# Altium PCB CaINv2.2.PcbDoc
Units mil, origin at the board's own origin, x right, y up, seen from the top; angles counter-clockwise.
Board outline 2625.03 x 2305.03 mil, 2 copper layers (Top Layer, Bottom Layer); 45 components, 41 nets, 135 pads, 17 vias.
Unrouted connection lines stored in the file: 70.
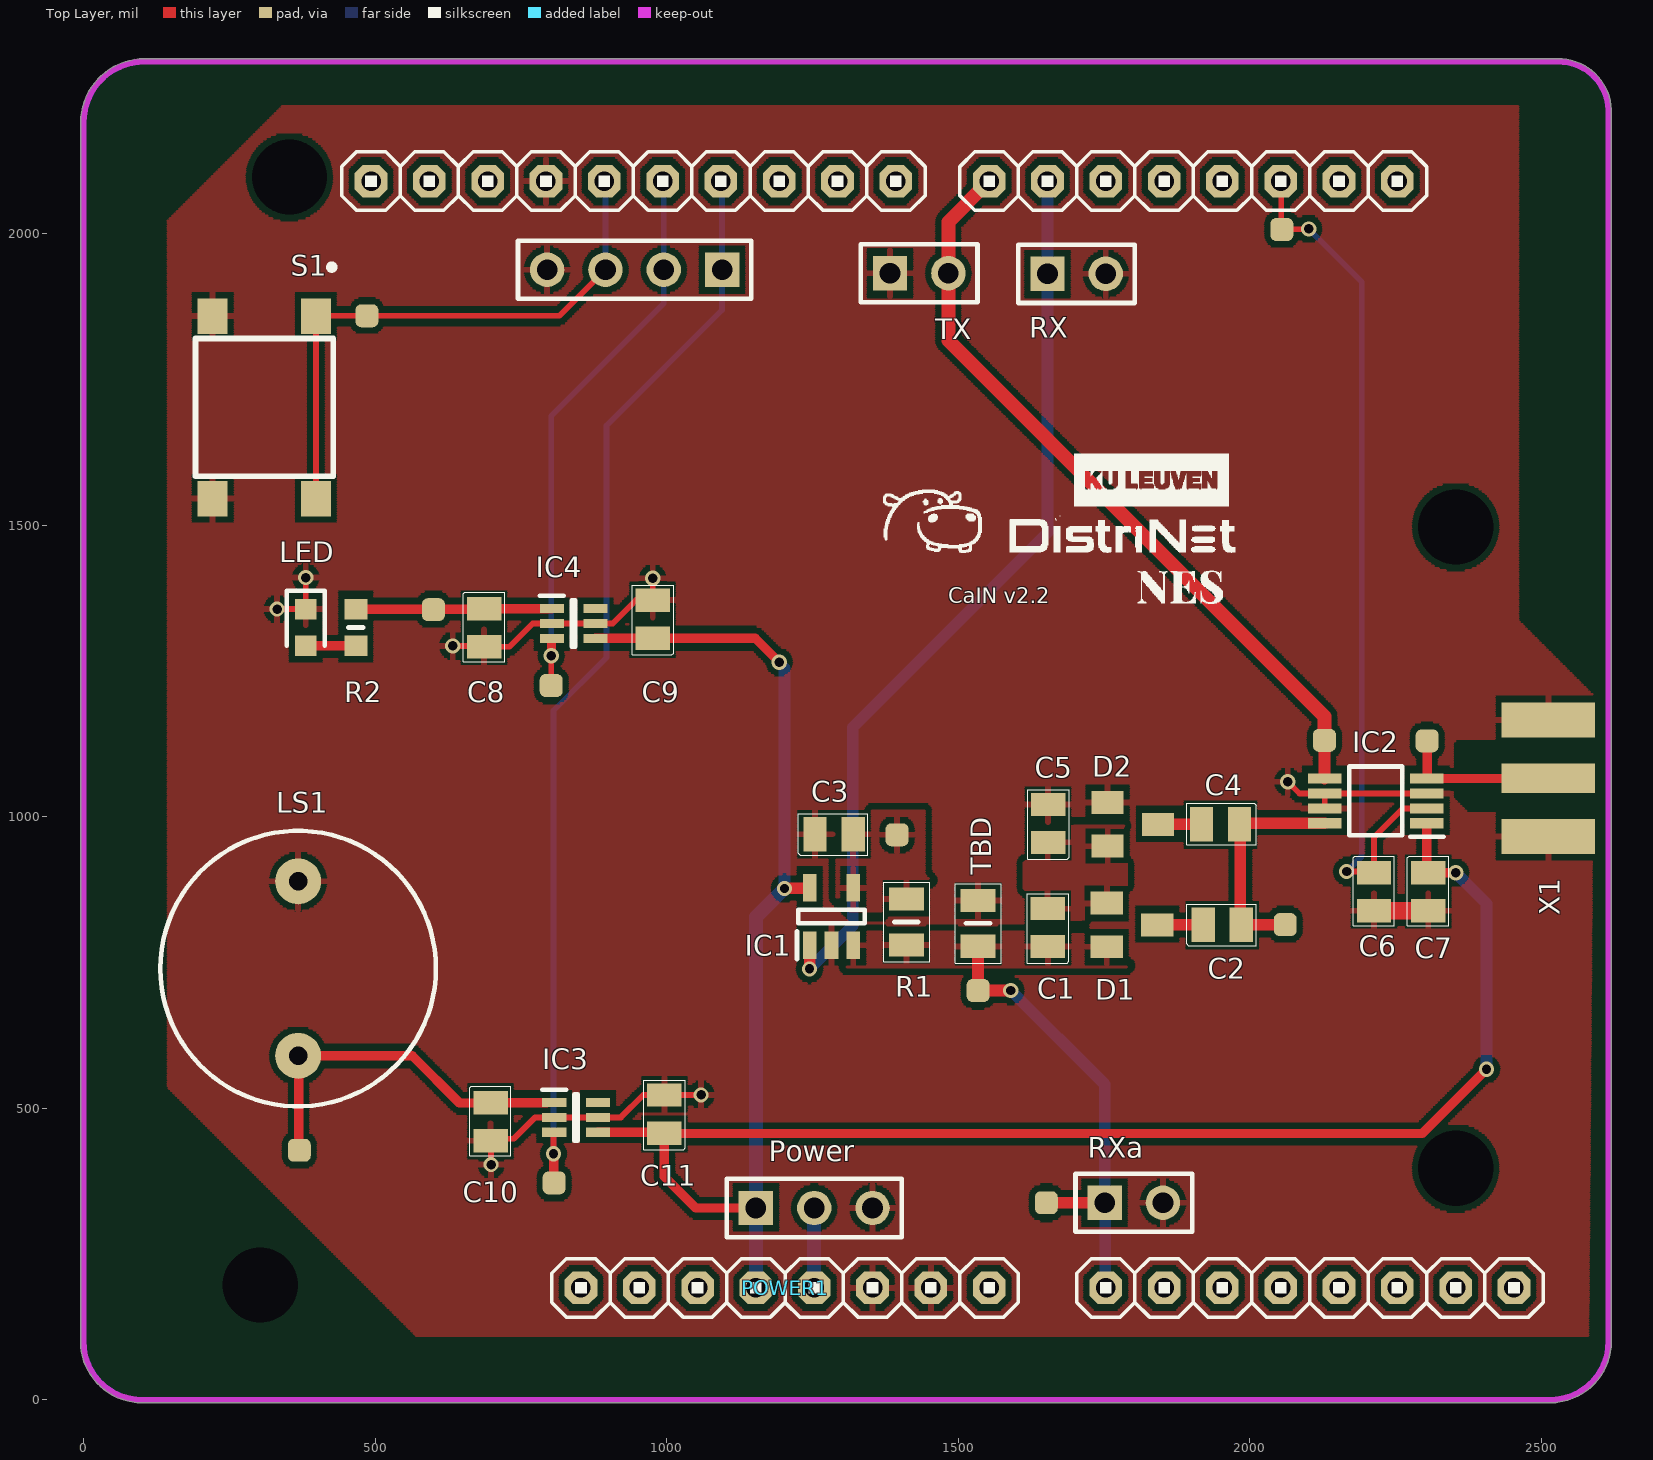
[diagram p0: Top Layer view]
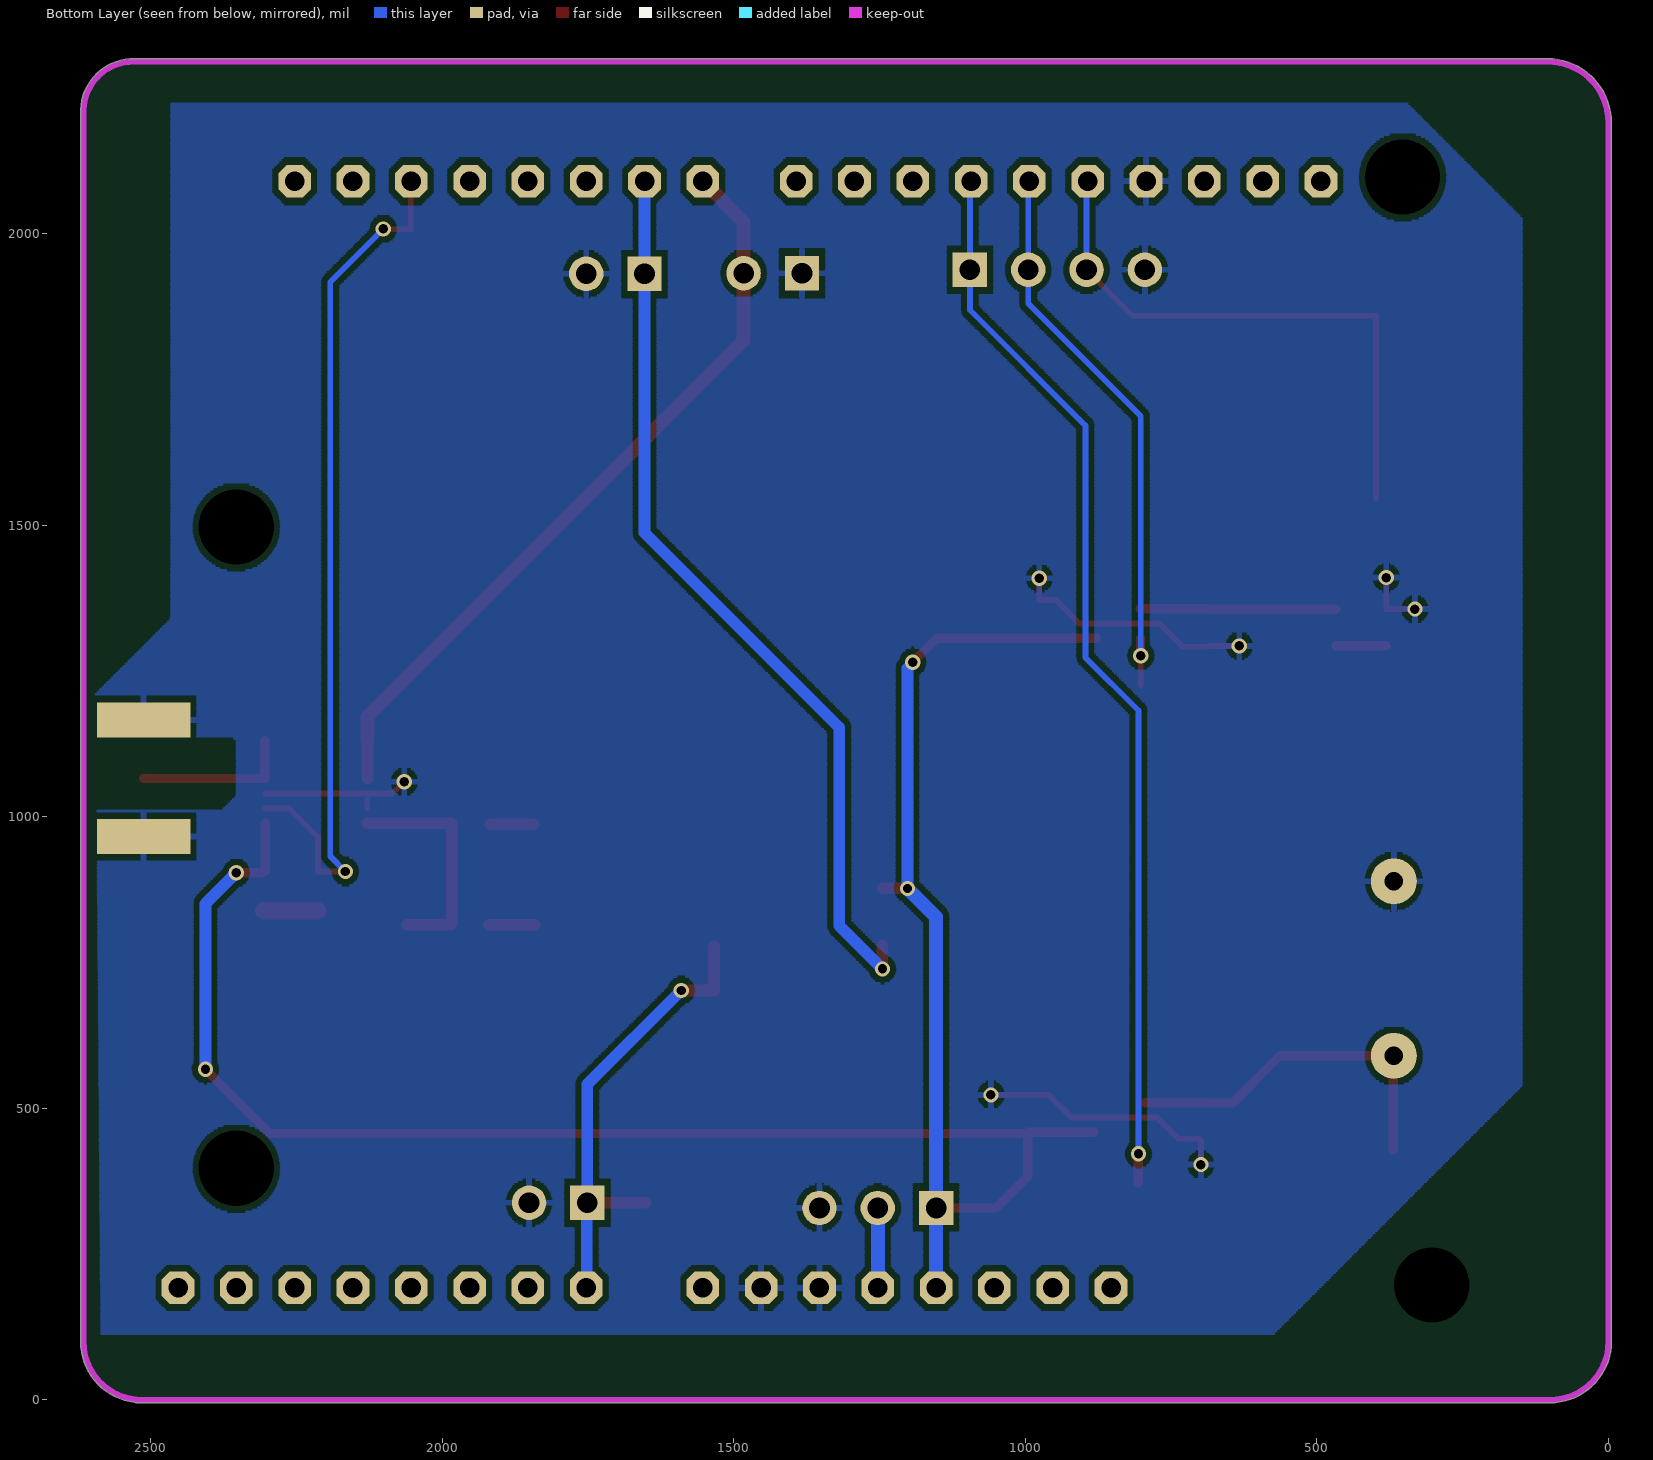
[diagram p1: Bottom Layer view, seen from below]

## Layer stack, top to bottom
Top Solder: solder mask 0.4, Solder Resist, Dk 3.5
Top Layer: signal copper 1.4
Dielectric 1: dielectric 12.6, FR-4, Dk 4.8
Bottom Layer: signal copper 1.4
Bottom Solder: solder mask 0.4, Solder Resist, Dk 3.5

## Board outline
-5.02,100 ccw(c100,100) 100,-5.02 2525,-5.02 2527.66,-4.25 ccw(c2515,100) 2620.02,100 2620.01,100.03 2619.64,2212.16 2619.64,2212.29 ccw(c2529.99,2209.99) 2527.76,2299.64 105,2300.01 ccw(c105,2190) -5.02,2190

## Design rules (kind name [scope] priority, off if disabled: settings)
Clearance [All] p1: gap=10 ignorepadtopadclearanceinfootprint=FALSE except(6: Arc-SMDPad Arc-Text Arc-Hole Track-SMDPad Track-Text Track-Hole SMDPad-SMDPad SMDPad-Text SMDPad-Hole THPad-Text THPad-Hole Via-Text Via-Hole Fill-Text Fill-Hole Poly-Text Poly-Hole Region-Text Region-Hole Text-Text Text-Hole; 8: Arc-Arc Arc-Track Arc-THPad Arc-Via Track-Track Track-THPad Track-Via SMDPad-THPad SMDPad-Via THPad-THPad THPad-Via Via-Via)
HoleSize [All] p1: absolutevalues=TRUE maxlimit=200 minlimit=1 maxpercent=80.000 minpercent=20.000
MinimumSolderMaskSliver [All] p1: minsoldermaskwidth=4
PolygonConnect [All] p1: connectstyle=Relief reliefconductorwidth=10 reliefentries=4 polygonreliefangle="90 Angle" airgapwidth=10
RoutingVias [All] p1: holewidth=16 width=26 viastyle="Through Hole" minholewidth=12 minwidth=22 maxholewidth=24 maxwidth=34
SilkToSilkClearance [All] p1: silktosilkclearance=2
SilkToSolderMaskClearance [IsPad] p1: minsilkscreentomaskgap=2 clearancetoexposedcopper=TRUE
SolderMaskExpansion [All] p1: expansion=4 istentingtop=FALSE
Width [All] p1: maxlimit=30 minlimit=6 preferedwidth=10
26 further rules are at their usual default settings.

## Classes and differential pairs
component class CaINv2.2: C1 C2 C3 C4 C5 C6 C7 C8 C9 C10 C11 D1 D2 IC1 IC2 IC3 IC4 LS1 POWER1 R1 R2 RF_switch S1 sma X1

## Components (designator, comment, footprint, x,y, rotation, side; value= is the part's Value field where it differs from the comment)
ADC1 "8x1F-H8.5" 1X08 2102.98,192 r0 top
C1 "4.7pF" CAPC2012X145N 1653.68,810 r270 top
C2 "4.7pF" CAPC2012X145N 1952.68,815 r180 top
C3 "10nF" CAPC2012X145N 1287,970 r180 top
C4 "4.7pF" CAPC2012X145N 1949.68,987 r0 top
C5 "4.7pF" CAPC2012X145N 1654,988.32 r270 top
C6 "100 pF" CAPC2012X145N 2213,871.32 r90 top
C7 "100 pF" CAPC2012X145N 2306,871.32 r90 top
C8 "0.1uF" CAPC2012X145N 687,1324 r90 top
C9 "0.1uF" CAPC2012X145N 976,1338.68 r270 top
C10 "0.1uF" CAPC2012X145N 698,477 r90 top
C11 "0.1uF" CAPC2012X145N 996,490 r270 top
D1 "RB706F-40FHT106" SOT23 1797.99,814.4 r270 top
D2 "RB706F-40FHT106" SOT23 1799.37,987 r270 top
IC1 "TLV7031DBVR" SOT95P280X145-5N 1282.6,828.79 r90 top
IC2 "ADG918BRMZ-REEL7" SOP65P490X110-8N 2216,1027 r180 top
IC3 "SIP32431DR3-T1GE3" SOT65P210X110-6N 844.6,484.41 r0 top
IC4 "SIP32431DR3-T1GE3" SOT65P210X110-6N 840.4,1331.41 r0 top
LED "LTST-C191KGKT" LEDC1608X55N 381,1324.5 r270 top (schematic designator LED1)
LS1 "CMI-1295IC-0385T" CMI1295IC0385T 368,889.21 r180 top
P4 "Header 4" HDR1X4 1095,1938 r180 top
Power "Header 3" HDR1X3 1153,329 r0 top (schematic designator P3)
POWER1 "8x1F-H8.5" 1X08 1202.98,192 r0 top
PWM1 "8x1F-H8.5" 1X08 1902.98,2090 r180 top locked
PWMH1 "10x1F-H8.5" 1X10 942.98,2090 r0 top locked
R1 "TBD" RESC2012X50N 1411,819.37 r270 top
R2 "40.2ohm" RESC1608X55N 467,1324.5 r270 top
RX "Header 2" HDR1X2 1653,1931 r0 top (schematic designator P2)
RXa "Header 2" HDR1X2 1751,338 r0 top (schematic designator P5)
S1 "Logger Switch" PTS645(SMT) 310,1702 r270 top
TBD "TBD" RESC2012X50N 1534,817 r270 top (schematic designator R4)
TP1 "TP" TestPoint 1395,969 r90 top
TP2 "TP" TestPoint 1534,702 r90 top
TP3 "TP" TestPoint 2055,2007 r180 top
TP4 "TP" TestPoint 1651,338 r90 top
TP5 "TP" TestPoint 2060.77,815 r90 top
TP6 "TP" TestPoint 802,1225 r90 top
TP7 "TP" TestPoint 2304,1130 r90 top
TP8 "TP" TestPoint 2128,1131 r90 top
TP9 "TP" TestPoint 486,1859 r90 top
TP10 "TP" TestPoint 600,1355 r90 top
TP11 "TP" TestPoint 370,428 r180 top
TP12 "TP" TestPoint 807,372 r90 top
TX "Header 2" HDR1X2 1383,1932 r0 top (schematic designator P1)
X1 "SMACONNECTOR_EDGE" SMA_EDGELAUNCH 2592,1066 r180 top

## Footprints (in the part's own frame and the unit in brackets; to place one, negate y for a bottom-side part, rotate by r counter-clockwise, add the part's x,y. Pads: shape width x height; smd on the part's side, far side on the other; paste and mask are expansions set on the pad)
1X08 [mil]
  oct 56x56 hole 33.46: 1(-350,0) 2(-250,0) 3(-150,0) 4(-50,0) 5(50,0) 6(150,0) 7(250,0) 8(350,0)
  silkscreen extent -400,-50 400,50
1X10 [mil]
  oct 56x56 hole 33.46: 1(-450,0) 2(-350,0) 3(-250,0) 4(-150,0) 5(-50,0) 6(50,0) 7(150,0) 8(250,0) 9(350,0) 10(450,0)
  silkscreen extent -500,-50 500,50
CAPC2012X145N [mil]
  rect 40x59 smd: 1(-32.68,0) 2(32.68,0)
  silkscreen extent -58,-35 61,36, body extent -39,-25 39,25, height 57
CMI1295IC0385T [mm]
  round 2 hole 0.8: 1(0,0) 2(0,7.6)
  silkscreen extent -6,-2.2 6,9.8, body extent -5.99,-2.2 5.99,9.8, height 9.7
HDR1X2 [mm] "Connector; Header; 2 Position"
  rect 1.5x1.5 hole 0.9: 1(0,0)
  round 1.5 hole 0.9: 2(2.54,0)
  silkscreen extent -1.27,-1.27 3.81,1.27, body extent -1.27,-1.27 3.81,1.27, height 7.58
HDR1X3 [mm] "Connector; Header; 3 Position"
  rect 1.5x1.5 hole 0.9: 1(0,0)
  round 1.5 hole 0.9: 2(2.54,0) 3(5.08,0)
  silkscreen extent -1.27,-1.27 6.35,1.27, body extent -1.27,-1.27 6.35,1.27, height 7.58
HDR1X4 [mm] "Connector; Header; 4 Position"
  rect 1.5x1.5 hole 0.9: 1(0,0)
  round 1.5 hole 0.9: 2(2.54,0) 3(5.08,0) 4(7.62,0)
  silkscreen extent -1.27,-1.27 8.89,1.27, body extent -1.27,-1.27 8.89,1.27, height 7.58
LEDC1608X55N [mm]
  rect 0.9x0.95 smd: 1(-0.8,0) 2(0.8,0)
  silkscreen extent -1.6,-0.82 0.8,0.82, body extent -0.83,-0.4 0.77,0.4, height 0.55
PTS645(SMT) [mm]
  rect 1.55x1.3 smd: 1(-3.975,2.25) 2(3.975,2.25) 3(-3.975,-2.25) 4(3.975,-2.25)
  silkscreen extent -6.23,-3 3,3.06, body extent -4.5,-3 4.5,3, height 4.3
RESC1608X55N [mm]
  rect 0.9x1 smd: 1(-0.8,0) 2(0.8,0)
  silkscreen extent 0,-0.33 0,0.33, body extent -0.8,-0.4 0.8,0.4, height 0.45
RESC2012X50N [mil]
  rect 40x60 smd: 1(-39.37,0) 2(39.37,0)
  silkscreen extent -68,-39 68,40, body extent -40,-25 40,25, height 20
SMA_EDGELAUNCH [mil]
  rect 160x60 smd paste+0: GND@1(80,-100) GND@2(80,100)
  rect 160x60 smd far side paste+0: GND@3(80,100) GND@4(80,-100)
  rect 160x50 smd paste+0: P(80,0)
SOP65P490X110-8N [mm]
  rect 1.45x0.45 smd: 1(-2.225,0.975) 2(-2.225,0.325) 3(-2.225,-0.325) 4(-2.225,-0.975) 5(2.225,-0.975) 6(2.225,-0.325) 7(2.225,0.325) 8(2.225,0.975)
  silkscreen extent -2.95,-1.5 1.15,1.55, body extent -2.45,-1.5 2.45,1.5, height 1.1
SOT23 [mm]
  rect 1x1.4 smd: 1(-0.95,-1.1) 2(0.95,-1.1) 3(0,1.1)
SOT65P210X110-6N [mm]
  rect 1.05x0.4 smd: 1(-0.95,0.65) 2(-0.95,0) 3(-0.95,-0.65) 4(0.95,-0.65) 5(0.95,0) 6(0.95,0.65)
  silkscreen extent -1.48,-1.01 0.08,1.2, body extent -1.05,-1.01 1.05,1.01, height 1.1
SOT95P280X145-5N [mm]
  rect 1.2x0.6 smd: 1(-1.25,0.95) 2(-1.25,0) 3(-1.25,-0.95) 4(1.25,-0.95) 5(1.25,0.95)
  silkscreen extent -1.85,-1.45 0.3,1.5, body extent -1.4,-1.45 1.4,1.45, height 1.45
TestPoint [mm]
  rrect50% 1x1 smd: TP(0,0)

## Part data
ADC1 POWER1 PWM1: library part PINHD-1X8
C1 C2 C4 C5 C6 C7 C8 C9 C10 C11: library part VJ0805A101JXBMC, "Capacitor", Manufacturer_Name=Vishay, Mouser Part Number=77-VJ0805A101JXBMC, Arrow Part Number=VJ0805A101JXBMC, Arrow Price/Stock=https://www.arrow.com/en/products/vj0805a101jxbmc/vishay?region=nac, Datasheet Link=http://www.vishay.com/docs/45226/vj31xrohsautomlcc.pdf, Height=1.45mm, Manufacturer_Part_Number=VJ0805A101JXBMC, Mouser Price/Stock=https://www.mouser.co.uk/ProductDetail/Vishay-Vitramon/VJ0805A101JXBMC?qs=DyYCzLTSlfCgHy2DX6Cz6w%3D%3D
C3: library part VJ0805Y103KXBAC, "Capacitor", Manufacturer_Name=Vishay, Mouser Part Number=77-VJ08Y100V103K, Arrow Part Number=VJ0805Y103KXBAC, Arrow Price/Stock=https://www.arrow.com/en/products/vj0805y103kxbac/vishay?region=nac, Datasheet Link=http://www.vishay.com/docs/45226/vj31xrohsautomlcc.pdf, Height=1.45mm, Manufacturer_Part_Number=VJ0805Y103KXBAC, Mouser Price/Stock=https://www.mouser.co.uk/ProductDetail/Vishay-Vitramon/VJ0805Y103KXBAC?qs=IRuQNBqMOckF0HeddYSaNg%3D%3D
D1 D2: library part DIODE_2CACA-SOT23, "2 Diodes - Cathode-Anode", DeviceName=SOT23, DeviceSetName=DIODE_2CACA-, GateName_1=-B1, LibraryName=diode, POPULARITY=1, SymbolName_1=KA2KA
IC1: "Integrated Circuit", Manufacturer_Name="Texas Instruments", Mouser Part Number=595-TLV7031DBVR, Arrow Part Number=TLV7031DBVR, Arrow Price/Stock=https://www.arrow.com/en/products/tlv7031dbvr/texas-instruments?region=nac, Datasheet Link=http://www.ti.com/lit/gpn/TLV7031, Height=1.45mm, Manufacturer_Part_Number=TLV7031DBVR, Mouser Price/Stock=https://www.mouser.co.uk/ProductDetail/Texas-Instruments/TLV7031DBVR?qs=EBDBlbfErPzxbC0zg598sw%3D%3D
IC2: "Integrated Circuit", Manufacturer_Name="Analog Devices", Mouser Part Number=584-ADG918BRMZ-R7, Arrow Part Number=ADG918BRMZ-REEL7, Arrow Price/Stock=https://www.arrow.com/en/products/adg918brmz-reel7/analog-devices, Datasheet Link=https://www.analog.com/media/en/technical-documentation/data-sheets/ADG918_919.pdf, Height=1.1mm, Manufacturer_Part_Number=ADG918BRMZ-REEL7, Mouser Price/Stock=https://www.mouser.co.uk/ProductDetail/Analog-Devices/ADG918BRMZ-REEL7?qs=BpaRKvA4VqEay0U7Dc17vw%3D%3D
IC3 IC4: "Integrated Circuit", Manufacturer_Name=Vishay, Mouser Part Number=781-SIP32431DR3-GE3, Arrow Part Number=SIP32431DR3-T1GE3, Arrow Price/Stock=https://www.arrow.com/en/products/sip32431dr3-t1ge3/vishay?region=nac, Datasheet Link=https://www.vishay.com/docs/66597/sip32431.pdf, Height=1.1mm, Manufacturer_Part_Number=SIP32431DR3-T1GE3, Mouser Price/Stock=https://www.mouser.co.uk/ProductDetail/Vishay-Semiconductors/SIP32431DR3-T1GE3?qs=FfLXECYddQQfTuH6ZEcWCg%3D%3D
LED: "LED", Manufacturer_Name=Lite-On, Mouser Part Number=859-LTST-C191KGKT, Arrow Part Number=LTST-C191KGKT, Arrow Price/Stock=https://www.arrow.com/en/products/ltst-c191kgkt/lite-on-technology?region=nac, Datasheet Link=http://www.mouser.com/ds/2/239/S_110_LTST-C191KGKT-369560.pdf, Height=0.55mm, Manufacturer_Part_Number=LTST-C191KGKT, Mouser Price/Stock=https://www.mouser.co.uk/ProductDetail/Lite-On/LTST-C191KGKT?qs=xSPZu9B1aMCRQ5ACasEYAg%3D%3D
LS1: "Loudspeaker or Buzzer", Manufacturer_Name="CUI Devices", Mouser Part Number=490-CMI-1295IC-0385T, Arrow Part Number=CMI-1295IC-0385T, Arrow Price/Stock=https://www.arrow.com/en/products/cmi-1295ic-0385t/cui-devices?region=nac, Datasheet Link=https://www.arrow.com/en/products/cmi-1295ic-0385t/cui-devices, Height=9.7mm, Manufacturer_Part_Number=CMI-1295IC-0385T, Mouser Price/Stock=https://www.mouser.co.uk/ProductDetail/CUI-Devices/CMI-1295IC-0385T?qs=OlC7AqGiEDk2g42uzfEhlg%3D%3D
P4: "Header, 4-Pin", LatestRevisionDate=17-Jul-2002, LatestRevisionNote="Re-released for DXP Platform.", Publisher="Altium Limited"
Power: "Header, 3-Pin", LatestRevisionDate=17-Jul-2002, LatestRevisionNote="Re-released for DXP Platform.", Publisher="Altium Limited"
PWMH1: library part PINHD-1X10
R1 TBD: library part RCS0805100KFKEA, "Resistor", Manufacturer_Name=Vishay, Mouser Part Number=71-RCS0805100KFKEA, Arrow Part Number=RCS0805100KFKEA, Arrow Price/Stock=https://www.arrow.com/en/products/rcs0805100kfkea/vishay?region=nac, Datasheet Link=https://componentsearchengine.com/Datasheets/2/RCS0805100KFKEA.pdf, Height=0.5mm, Manufacturer_Part_Number=RCS0805100KFKEA, Mouser Price/Stock=https://www.mouser.co.uk/ProductDetail/Vishay-Dale/RCS0805100KFKEA?qs=NKmfXavxMay%252BH0mbX9hKBw%3D%3D
R2: library part ERJ-3EKF40R2V, "Resistor", Manufacturer_Name=Panasonic, Mouser Part Number=667-ERJ-3EKF40R2V, Datasheet Link=http://industrial.panasonic.com/cdbs/www-data/pdf/RDA0000/AOA0000C86.pdf, Height=0.55mm, Manufacturer_Part_Number=ERJ-3EKF40R2V, Mouser Price/Stock=https://www.mouser.co.uk/ProductDetail/Panasonic/ERJ-3EKF40R2V?qs=MVjVSMjNRMp%252B0A6%252BSZkn3A%3D%3D
RX RXa TX: "Header, 2-Pin", LatestRevisionDate=17-Jul-2002, LatestRevisionNote="Re-released for DXP Platform.", Publisher="Altium Limited"
S1: library part PTS645SM43SMTR92LFS, "SwitchPTS645SM43SMTR92LFS", Manufacturer_Name="C & K COMPONENTS", Mouser Part Number=611-PTS645SM43SMTR92, Arrow Part Number=PTS645SM43SMTR92LFS, Arrow Price/Stock=https://www.arrow.com/en/products/pts645sm43smtr92lfs/ck, Datasheet Link=https://www.ckswitches.com/media/1471/pts645.pdf, Manufacturer_Part_Number=PTS645SM43SMTR92LFS, Mouser Price/Stock=https://www.mouser.co.uk/ProductDetail/CK/PTS645SM43SMTR92LFS?qs=FESYatJ8odKPktxv6ncfWg%3D%3D
TP1 TP2 TP3 TP4 TP5 TP6 TP7 TP8 TP9 TP10 TP11 TP12: library part TestPoint
X1: "SMA Connector   90掳 DIP SMA Connector, 50 Ohm (4UConnector: 07259)", DeviceName=_EDGE, DeviceSetName=SMACONNECTOR, GateName_1=G$1, LibraryName=adafruit, SymbolName_1=SMACONNECTOR

## Free pads (board coordinates)
  round 0 hole 128.98 unplated: M1(352.98,2097) M2(302.98,197) M3(2352.98,1497) M4(2352.98,397)

## Via types
v1: diameter 26, hole 16, Top Layer to Bottom Layer, 17 vias

## Nets (pads, with @x,y where several pads share a name; then routed paths per layer and width w, separated by ;. In a path a pad name is that pad's centre, name@x,y a point inside that pad or via, vN(x,y) a via of type N, cw(c..) or ccw(c..) an arc to the next point about the centre after c; other vN are vias at no path point)
5V: POWER1.5 Power.2 | length 137
  Bottom Layer w24: POWER1.5 Power.2
Antenna: IC2.4 TP7.TP X1.P | length 272.9
  Top Layer w16: IC2.4 2511.39,1065.39 X1.P ; IC2.4@2304,1065.79 TP7.TP
BeepPositive: C10.2 IC3.1 LS1.2 TP11.TP | length 619.3
  Top Layer w16: LS1.2 563.68,590 644.53,509.16 C10.2@697.48,509.16 ; TP11.TP@369,429 LS1.2@369,589 ; C10.2 IC3.1@794.33,509.68
BeepSW: IC3.3 P4.1 PWMH1.7 TP12.TP | length 1873.2
  Top Layer w10: v1(806,422) IC3.3@806,457.62
  Top Layer w16: TP12.TP@806.5,372.5 v1@806.5,421.5
  Bottom Layer w10: v1(806,422) 806,1182 897,1273 897,1671 1095,1869 1095,2087.98 PWMH1.7
Comparator_vRef: C3.1 IC1.4 R1.1 TP1.TP
GND: C3.2 C5.1 C6.1 C7.1 C8.1 C9.1 C10.1 C11.1 D2.1 IC1.2 IC2.3 IC2.6 IC2.7 IC3.2 IC3.5 IC4.2 IC4.5 LED.1 LS1.1 P4.4 POWER1.6 POWER1.7 Power.3 PWMH1.4 RX.2 RXa.2 S1.3 S1.4 TBD.1 TX.1 X1.GND@1 X1.GND@2 X1.GND@3 X1.GND@4 | length 1314.8
  Top Layer w10: v1(332,1356) LED.1 v1(381,1410) ; v1(633,1293) C8.1@685.32,1293 ; C8.1 730.32,1291.32 770.41,1331.41 IC4.2 IC4.5 907.41,1331.41 947.35,1371.35 C9.1 ; v1(699,403.32) 698.46,403.87 698.46,443.87 C10.1 701.32,447.64 737.64,447.64 774.41,484.41 IC3.2 921.41,484.41 959.68,522.68 C11.1 ; v1(976,1409) 976,1372.65 C9.1@976.65,1372 ; C11.1@996.32,523 v1(1059,523) ; v1(2065,1060) 2085.2,1039.8 IC2.6 ; IC2.7 IC2.6 ; IC2.3 IC2.6
  Top Layer w30: C6.1 C7.1
LED: IC4.3 P4.2 PWMH1.6 TP6.TP | length 975
  Top Layer w10: TP6.TP v1(802,1276)
  Top Layer w16: v1@802.5,1276.5 IC4.3@802.5,1305.69
  Bottom Layer w10: v1(802,1276) 802,1687 995,1880 995,2087.98 PWMH1.6
LED3V3: C8.2 IC4.1 R2.1 TP10.TP | length 333
  Top Layer w16: R2.1@467.5,1355.5 TP10.TP@599.5,1355.5 ; TP10.TP@600.84,1355.84 C8.2@686.16,1355.84 ; C8.2@687.2,1356.87 IC4.1@802.87,1356.87
"Logger Button": P4.3 PWMH1.5 S1.1 S1.2 TP9.TP | length 994.5
  Top Layer w10: S1.2 S1.1 ; S1.1@399.09,1859 TP9.TP 816,1859 P4.3
  Bottom Layer w10: PWMH1.5 895,2087.98 P4.3
NetADC1_2: ADC1.2
NetADC1_3: ADC1.3
NetADC1_4: ADC1.4
NetADC1_5: ADC1.5
NetADC1_6: ADC1.6
NetADC1_7: ADC1.7
NetADC1_8: ADC1.8
NetC1_1: C1.1 C5.2 D1.1 D2.2
NetC2_2: C2.2 D1.3 | length 78.1
  Top Layer w20: D1.3@1841.6,814.7 C2.2@1919.7,814.7
NetC4_1: C4.1 D2.3 | length 74.3
  Top Layer w20: D2.3 C4.1
NetLED1_2: LED.2 R2.2 | length 86
  Top Layer w16: LED.2 R2.2
NetPOWER1_1: POWER1.1
NetPOWER1_2: POWER1.2
NetPOWER1_3: POWER1.3
NetPOWER1_8: POWER1.8
NetPWM1_1: PWM1.1
NetPWM1_2: PWM1.2
NetPWM1_4: PWM1.4
NetPWM1_5: PWM1.5
NetPWM1_6: PWM1.6
NetPWMH1_1: PWMH1.1
NetPWMH1_2: PWMH1.2
NetPWMH1_3: PWMH1.3
NetPWMH1_8: PWMH1.8
NetPWMH1_9: PWMH1.9
NetPWMH1_10: PWMH1.10
Rx_DueGPIO: IC1.1 PWM1.7 RX.1 | length 1560.4
  Top Layer w20: v1@1245.1,739.1 IC1.1@1245.1,779.48
  Bottom Layer w20: v1(1245,739) 1319,813 1319,1153 1653,1487 RX.1 PWM1.7
Rx_StaticInput: C2.1 C4.2 IC2.8 TP5.TP | length 389.1
  Top Layer w20: C2.1@1983.85,816.5 C4.2@1983.85,985.5 ; C4.2@1983.97,988.61 IC2.8 ; C2.1 TP5.TP@2061,815
Rx_StaticOutput: ADC1.1 C1.2 D1.2 IC1.3 R1.2 RXa.1 TBD.2 TP2.TP TP4.TP | length 806.3
  Top Layer w20: TBD.2 TP2.TP v1(1590,702) ; TP4.TP RXa.1
  Bottom Layer w20: v1(1590,702) 1751,541 RXa.1 ; ADC1.1@1751.99,192.99 RXa.1@1751.99,337.01
T/R_SwitchGPIO: C6.2 IC2.2 PWM1.3 TP3.TP | length 1493.4
  Top Layer w10: TP3.TP@2053.99,2007 PWM1.3@2053.99,2088.99 ; TP3.TP@2055.5,2007.5 v1@2100.5,2007.5 ; v1(2166,906) C6.2@2211,906 ; C6.2@2213,905 2213,965 2262.2,1014.2 IC2.2
  Bottom Layer w10: v1(2101,2008) 2192,1917 2192,932 v1(2166,906)
Tx_DueGPIO: IC2.5 PWM1.8 TP8.TP TX.2 | length 1320.4
  Top Layer w20: IC2.5@2128.2,1065.59 TP8.TP@2128.2,1130.8
  Top Layer w24: PWM1.8 1483,2020.02 TX.2 1483,1817 2128,1172 TP8.TP
VCC3V3: C7.2 C9.2 C11.2 IC1.5 IC2.1 IC3.4 IC4.4 POWER1.4 Power.1 | length 3777.9
  Top Layer w16: IC4.4 877.89,1305.91 C9.2@975.91,1305.91 ; IC3.4@882.13,458.69 C11.2@994.63,458.69 ; C9.2 C9.2@975.91,1305.91 ; C11.2 996,383 1050,329 Power.1 ; C11.2@996.66,456.66 2295.66,456.66 v1(2406,567) ; v1(1193,1265) 1152.09,1305.91 C9.2@975.91,1305.91 ; C7.2@2303.6,906.4 IC2.1 ; C7.2@2309,904 v1(2353,904)
  Top Layer w20: v1@1202.5,877.5 IC1.5@1244.7,877.5
  Bottom Layer w20: v1(1193,1265) 1193,1263.38 1202,1254.38 v1(1202,877) ; v1(2353,904) 2406,851 v1(2406,567)
  Bottom Layer w24: POWER1.4 Power.1 1153,828 v1(1202,877)
pads on no net: IC3.6 IC4.6

## Polygon pours and split planes (outlines as drawn)
GND on Top Layer "GND_L01_P012" (hatched Horizontal grid 4 track 5, remove dead copper, pour order 12): 340,2217.44 145,2022.44 145,535.44 571,109.44 2548,109.44 2580,109.44 2587,1008.44 2372,1008.44 2348,1032.44 2348,1126.44 2353,1131.44 2594,1131.44 2594,1202.44 2460,1336.44 2460,2220.44 343,2220.44
NetC1_1 on Top Layer "NETC1_1_L01_P010" (solid, remove dead copper, pour order 10): 1788,986 1791,983 1791,822 1610.57,822 1609.68,822.89 1611,824.22 1611,986
Rx_StaticOutput on Top Layer "RX_STATICOUTPUT_L01_P009" (hatched Horizontal grid 4 track 5, remove dead copper, pour order 9): 1791,802 1790,803 1344,803 1335,812 1330,807 1304,807 1301,804 1301,750 1310,741 1787.24,741 1791.88,745.64 1791,746.52
Comparator_vRef on Top Layer "Comparator_vRef" (hatched Horizontal grid 4 track 5, remove dead copper, pour order 8): 1442,1010 1442,901 1453,890 1452,889 1452,834 1318,834 1291,861 1291,1011 1318,1011 1319,1010 1318,1011 1319,1010
GND on Bottom Layer "GND_L02_P013" (hatched Horizontal grid 4 track 5, remove dead copper, pour order 13): 344,2221 149,2026 149,539 575,113 2552,113 2584,113 2591,1012 2376,1012 2352,1036 2352,1130 2357,1135 2598,1135 2598,1206 2464,1340 2464,2224 347,2224

## Keep-outs
Keep-Out Layer:
  lines w10: 2515,0 ccw(c2515,100) 2615,100 2614.63,2212.16 ccw(c2529.99,2209.99) 2527.82,2294.63 105,2295 ccw(c105,2190) 0,2190 0,100 ccw(c100,100) 100,0 2525,0

## Silkscreen, mask and mechanical layers (free items; w line width, h text height)
Top Overlay:
  drawing of 23 lines, arcs and shapes, not listed
  text "CaIN v2.2" at 1483,1366 h26

## Dimensions
2646,-172 to 2758,2278 on Multi-Layer
0,-1 to 2646,-274 on Multi-Layer